# EAGLE board bigben (EAGLE 6.5.0)
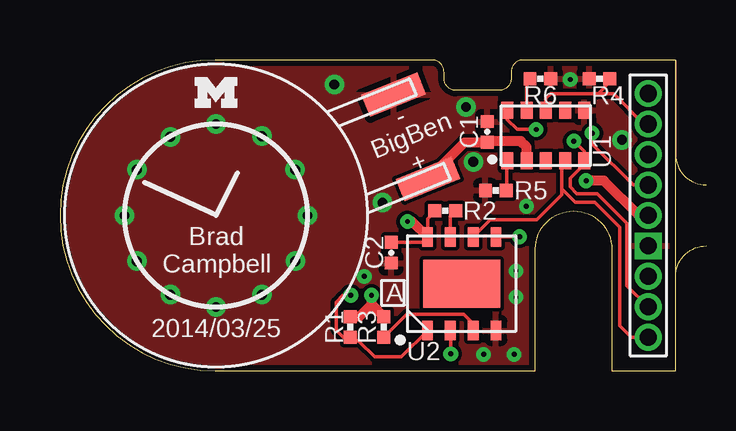
[diagram p0: board, top side]
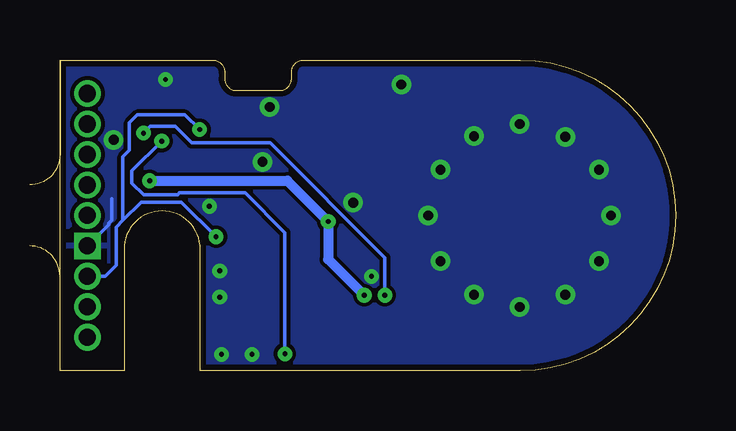
[diagram p1: board, bottom side, seen from below]

Size 25.65 x 12.95 mm. Coordinates in mm from the lower left corner, seen from the top.
Outline: 6.48,0 19.81,0 19.81,5.08 arc-180 22.99,5.08 22.99,0 25.65,0 25.65,12.95 19.3,12.95 arc90 18.8,12.45 18.8,12.19 arc-90 18.29,11.68 16.51,11.68 arc-90 16,12.19 16,12.45 arc90 15.49,12.95 6.48,12.95 arc180 6.48,0
Copper layers (1*16): Top 0.0178mm / dielectric 59mil / Bottom 0.0178mm
Design rules "sunstone-2lyr_v1.0.0.3 *": minimum track width 6mil, minimum drill 14mil, track to track 6mil, track to pad 6mil, pad to pad 6mil, via to via 6mil, smd to smd 6mil, copper to edge 10mil, drill to drill 16mil, minimum pad ring 8mil, minimum via ring 8mil, stop-mask expansion 3mil, vias tented up to drill 100mil, thermal gap 10mil
Milling: 19 lines

## Footprints (pad centres in the part's own frame; a part is rotated, then mirrored left to right if it is on the bottom)
ML-1220/F1BN = smd 2.5 x 1: NEG 8.75,1.9; POS 8.75,-1.9
0402_CAP = smd 0.536 x 0.546: 1 -0.433,0; 2 0.433,0
HEADER1X9/0.05IN = drill 0.711 pad 1.016 square: 0 -1.27,0 | drill 0.711 pad 1.016: 1 0,0; 2 1.27,0; 3 2.54,0; 4 3.81,0; 5 5.08,0; -1 -2.54,0; -2 -3.81,0; -3 -5.08,0
0402_RES = smd 0.536 x 0.546: 1 -0.433,0; 2 0.433,0
MICRO-CRYSTAL-C3 = smd 0.5 x 0.7: 1 -1.6,-1.05; 2 -0.8,-1.05; 3 0,-1.05; 4 0.8,-1.05; 5 1.6,-1.05; 6 1.6,1.05; 7 0.8,1.05; 8 0,1.05; 9 -0.8,1.05; 10 -1.6,1.05
TDFN-8 = smd 0.45 x 0.8: 1 -1.425,-1.95; 2 -0.475,-1.95; 3 0.475,-1.95; 4 1.425,-1.95; 5 1.425,1.95; 6 0.475,1.95; 7 -0.475,1.95; 8 -1.425,1.95 | smd 3.2 x 2: NC 0,0

## Placement (x,y rotation side)
BT1  ML-1220/F1AN  [ML-1220/F1BN]  6.5,6.48 22 top
C1  10nF  [0402_CAP]  17.81,9.96 90 top
C2  0.1uF  [0402_CAP]  13.8,4.93 270 top
J3  IMPULSE_GECKO_HEADER  [HEADER1X9/0.05IN]  24.51,6.48 90 top
LOGO1  UMICH_SOLID_TINY  [UMICH_SOLID_50MIL]  6.5,11.61 0 top
R1  4.7k  [0402_RES]  12.09,1.83 90 top
R2  4.7k  [0402_RES]  16.05,6.67 180 top
R3  4.7k  [0402_RES]  13.49,1.83 90 top
R4  4.7k  [0402_RES]  22.48,12.17 0 top
R5  10k  [0402_RES]  18.16,7.52 0 top
R6  10k  [0402_RES]  20.02,12.17 180 top
U1  RV-3049-C3  [MICRO-CRYSTAL-C3]  20.24,9.8 0 top
U2  FM25LBTDFN-8  [TDFN-8]  16.74,3.63 0 top

## Library data of the parts
BT1 = batteries; DIGIKEY: P663-nd; MOUSER: 658-ML-1220/F1BN
C1 C2 R1-R6 = passives
J3 = gecko
LOGO1 = logos
U1 = chips
U2 = chips; MOUSER: 877-FM25V20-DG

## Nets
!FRAM_CS: J3.2 R1.1 U2.1
!FRAM_HOLD: R2.1 U2.7
!FRAM_WP: R3.1 U2.3
BATTERY: BT1.POS C1.1 U1.2
GND: BT1.NEG C1.2 C2.2 J3.0 R4.1 R5.1 R6.1 U1.6 U2.4
MISO0: J3.-2 U1.5 U2.2
MOSI0: J3.-1 U1.10 U2.5
N$6: R6.2 U1.9
N$7: R5.2 U1.1
RTC_CS: J3.4 R4.2 U1.8
SCLK0: J3.-3 U1.4 U2.6
SHD: J3.3
VCAP: J3.5
VCC: C2.1 J3.1 R1.2 R2.2 R3.2 U2.8

## Tracks (layer width: path | path; a pad name or v marks a point on that pad's centre or on a via)
!FRAM_CS  (via drill 0.2)
  Top 0.152: U2.1 14.21,0.58 13.11,0.58 12.47,1.22 R1.1 11.81,1.4 11.51,1.7 11.51,2.87 11.79,3.15 v12.12,3.15 | J3.2 23.88,7.75 22.17,9.45 v22.17,9.91
  Bottom 0.152: v22.17,9.91 21.89,10.19 20.85,10.19 20.17,9.5 16.89,9.5 12.12,4.72 v12.12,3.15
!FRAM_HOLD
  Top 0.152: U2.7 16.26,6.45 R2.1
!FRAM_WP
  Top 0.152: U2.3 17.21,1.96 16.82,2.36 14.45,2.36 R3.1
BATTERY
  Top 0.406: 17.83,9.5 C1.1 | U1.2 19.44,9.33 19.2,9.58 17.86,9.58 C1.1 | C1.1 16.86,9.52 BT1.POS
GND  (via drill 0.2, 0.41)
  Bottom 0.152: J3.0 23.62,6.1 23.62,6.15 23.5,6.27 23.5,7.16
  other vias: 11.43,11.94 17.22,8.71 23.42,9.63 19.43,6.86 21.26,12.14 19,4.17 19,3.07 12.67,3.94 13.44,7.01 16.92,11 18.92,0.69 17.65,0.69 6.5,10.29 6.5,2.67 10.31,6.48 2.69,6.48 9.8,8.38 8.41,9.78 4.6,3.17 3.2,4.57 3.2,8.38 8.41,3.17 4.6,9.75 9.8,4.57
  pour Top: 26.16,13.72 26.16,-0.51 -1.35,-0.51 -1.35,13.72
  pour Bottom: -1.32,13.72 26.16,13.72 26.16,-0.51 -1.32,-0.51
MISO0  (via drill 0.2)
  Top 0.152: J3.-2 23.62,3.56 23.62,6.15 22.38,7.39 21.54,7.39 21.26,7.67 21.26,8.03 21.84,8.61 U1.5 21.84,9.14 v21.41,9.58 | v16.28,0.71 16.28,1.66 U2.2
  Bottom 0.152: v16.28,0.71 16.28,5.77 17.93,7.42 20.68,7.42 20.75,7.34 22.17,7.34 22.66,7.82 22.66,8.33 v21.41,9.58
MOSI0  (via drill 0.2)
  Top 0.152: v19.15,5.59 U2.5 | U1.10 18.64,10.46 19.05,10.06 v19.84,10.06
  Bottom 0.152: J3.-1 23.77,3.94 23.32,4.39 23.32,5.99 23.04,6.27 | v19.15,5.59 20.6,7.04 22.28,7.04 23.04,6.27 | v19.84,10.06 20.45,10.67 22.43,10.67 22.76,10.34 22.76,9.2 23.04,8.91 23.04,6.27
N$6
  Top 0.152: U1.9 19.44,12.03 R6.2
N$7
  Top 0.152: U1.1 18.62,8.73 18.62,7.54 R5.2
RTC_CS
  Top 0.152: U1.8 20.24,11.35 20.45,11.56 22.43,11.56 | 22.43,11.56 22.91,12.04 R4.2 | J3.4 24.33,10.29 23.06,11.56 22.43,11.56
SCLK0
  Top 0.152: J3.-3 23.8,1.4 23.32,1.88 23.32,5.99 22.28,7.04 21.46,7.04 20.9,7.59 | U2.6 17.93,6.3 19.86,6.3 20.9,7.34 20.9,7.59 | 20.9,7.59 20.9,8.62 U1.4
VCC  (via drill 0.2)
  Top 0.152: R2.2 15.64,6.67 15.31,6.35 U2.8 15.09,5.36 C2.1
  Top 0.406: v14.48,6.22 14.67,6.22 U2.8 | 12.98,2.77 R3.2 | 12.98,2.77 v12.98,3.15 | J3.1 24.11,6.48 22.66,7.92 v21.92,7.92 | 12.98,2.77 12.47,2.26 R1.2
  Bottom 0.406: v12.98,3.15 14.48,4.65 v14.48,6.22 16.18,7.92 v21.92,7.92

## Text on the board
tPlace: - | BigBen | + | Brad / Campbell | A | 2014/03/25
tDocu: VCAP | OV | SHTD | TRIG | VREG | GND | MOSI | MISO | SCL